# Altium PCB Wenzel_REF.PCBDOC (part 2 of 7)
Units mm, origin at the board's own origin, x right, y up, seen from the top; angles counter-clockwise.
Board outline 222.63 x 100.1 mm, 4 copper layers (Top, L2, L3, Bot), stack 1.6 mm thick; 406 components, 236 nets, 1324 pads, 1362 vias.
Unrouted connection lines stored in the file: 1.
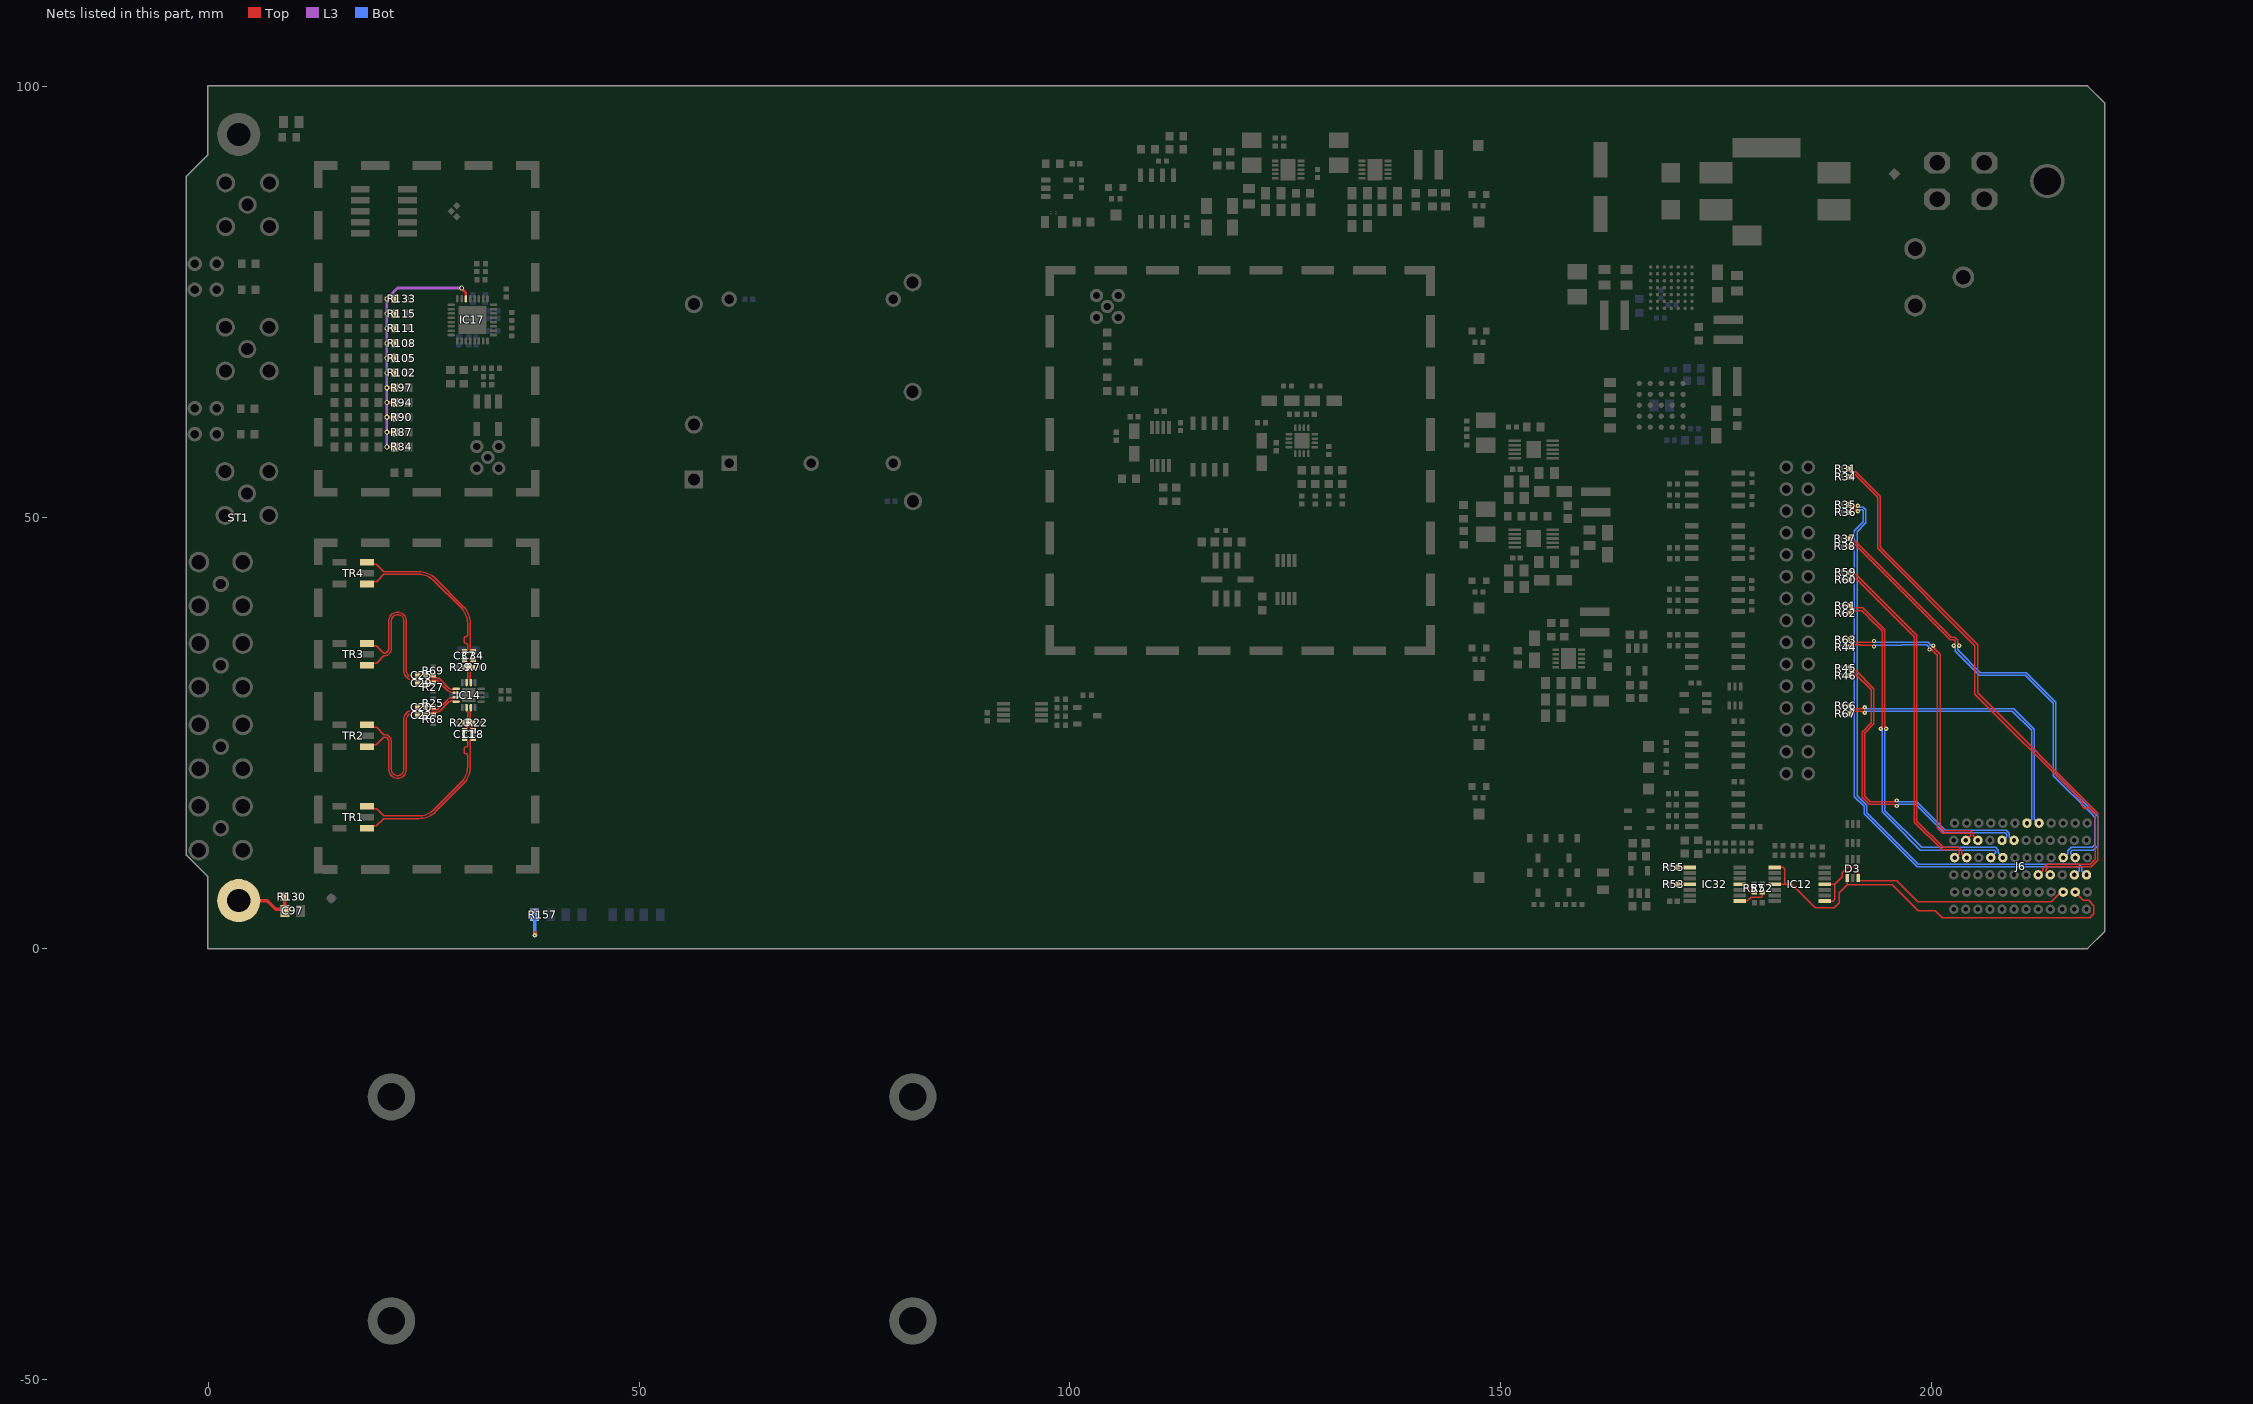
[diagram p4: the nets of this part, all layers, seen from the top]

## Footprints (in the part's own frame and the unit in brackets; to place one, negate y for a bottom-side part, rotate by r counter-clockwise, add the part's x,y. Pads: shape width x height; smd on the part's side, far side on the other; paste and mask are expansions set on the pad) (continued)
MSBOX_LAIRD_BMI-S-207-F [mm] "Frame of Standard Surface Mount Shield (Two Piece), External Dimensions 44.37 x 44.37mm"
  rect 1x3.485 smd: 1(-22.085,20.843) 8(-22.085,-20.843) 15(22.085,-20.843) 22(22.085,20.843)
  rect 2.485x1 smd: 1(-20.342,22.085) 8(-20.342,-22.085) 15(20.342,-22.085) 22(20.342,22.085)
  rect 1x3.8 smd: 2(-22.085,15) 3(-22.085,9) 4(-22.085,3) 5(-22.085,-3) 6(-22.085,-9) 7(-22.085,-15) 16(22.085,-15) 17(22.085,-9) 18(22.085,-3) 19(22.085,3) 20(22.085,9) 21(22.085,15)
  rect 3.8x1 smd: 9(-15,-22.085) 10(-9,-22.085) 11(-3,-22.085) 12(3,-22.085) 13(9,-22.085) 14(15,-22.085) 23(15,22.085) 24(9,22.085) 25(3,22.085) 26(-3,22.085) 27(-9,22.085) 28(-15,22.085)
  silkscreen extent -22.94,-22.94 22.94,22.94, body extent -22.23,-22.23 22.24,22.24, height 9.75
"Net Tie" [mil] "SMD Net Tie"
  rect 5x5 smd paste-2.5 mask-2.5: 1(0,0) 2(10,0)
  Top lines w5: 10,0 0,0
OSC_PLETRONICS_OLA5 [mm] "Oscillator, 5 Leads, Body 27.2mm X 36.1mm, KVG Case Style BF9-IS-S-15"
  rect 1.8x1.8 hole 1.1: 1(-9.525,9.525)
  round 1.8 hole 1.1: 2(-9.525,0) 3(-9.525,-9.525) 4(9.525,-9.525) 5(9.525,9.525)
  silkscreen extent -12.89,-12.89 12.89,12.89, body extent -12.89,-12.89 12.89,12.89, height 13.36
OSC_WENZEL_501-27514-X4 [mm] "Oscillator, 5 Pin, 50.8mm L X 50.8mm W X 19.05mm H, 501 Series"
  rect 2.1x2.1 hole 1.4: 1(-12.7,-10.16)
  round 2.1 hole 1.4: 2(12.725,-12.7) 3(12.7,0) 4(12.7,12.7) 5(-12.7,10.16) 6(-12.7,-3.81)
  silkscreen extent -25.4,-25.4 25.4,27.4, body extent -25.4,-25.4 25.4,27.4, height 19.05
PCBM_U-BLOX_RCB-F9T-1_A [mm] "UBLOX Board  Reference RCB-F9T-1 Body 67.17mm x 31.75mm"
  round 5.5 hole 3.2: MEC1(-30.735,13) MEC3(29.765,-13) MEC4(29.765,13)
  round 5.5 hole 3.2 unplated: MEC2(-30.735,-13)
  silkscreen extent -38.8,-15.88 33.59,15.88, body extent -38.8,-15.88 33.59,15.88, height 9.63
QFN50P300X300X80-17N-S160 [mm] "QFN, 0.50mm Pitch, Square; 4 Pin X 4 Pin, 3mm X 3mm X 0.80mm H Body (w/Thermal tab 1.60 X 1.60mm),  IPC Medium Density"
  oval 0.85x0.3 smd: 1(-1.45,0.75) 2(-1.45,0.25) 3(-1.45,-0.25) 4(-1.45,-0.75) 9(1.45,-0.75) 10(1.45,-0.25) 11(1.45,0.25) 12(1.45,0.75)
  oval 0.3x0.85 smd: 5(-0.75,-1.45) 6(-0.25,-1.45) 7(0.25,-1.45) 8(0.75,-1.45) 13(0.75,1.45) 14(0.25,1.45) 15(-0.25,1.45) 16(-0.75,1.45)
  rect 1.6x1.6 smd: 17(0,0)
  silkscreen extent -2.58,-1.5 1.5,1.5, body extent -1.57,-1.57 1.58,1.58, height 0.8
QFN50P300X300X80-17N-S175 [mm] "QFN, 0.50mm Pitch, Square; 16 Pin, 3.00mm L X 3.00mm W X 0.80mm H Body (w/Thermal Tab 1.75 X 1.75mm),  IPC Medium Density"
  oval 0.8x0.3 smd: 1(-1.5,0.75) 2(-1.5,0.25) 3(-1.5,-0.25) 4(-1.5,-0.75) 9(1.5,-0.75) 10(1.5,-0.25) 11(1.5,0.25) 12(1.5,0.75)
  oval 0.3x0.8 smd: 5(-0.75,-1.5) 6(-0.25,-1.5) 7(0.25,-1.5) 8(0.75,-1.5) 13(0.75,1.5) 14(0.25,1.5) 15(-0.25,1.5) 16(-0.75,1.5)
  rect 1.75x1.75 smd: 17(0,0)
  silkscreen extent -2.62,-1.5 1.5,1.5, body extent -1.57,-1.57 1.58,1.58, height 0.8
QFN50P500X500X100-33N-S325 [mm] "QFN, (MO-220-VHHD-2) 0.50mm pitch,square; 8 pin X 8 pin, 5mm X 5mm X 1.00mm H body (w/thermal tab 3.25 X 3.25mm),  IPC Medium Density"
  oval 0.85x0.3 smd: 1(-2.45,1.75) 2(-2.45,1.25) 3(-2.45,0.75) 4(-2.45,0.25) 5(-2.45,-0.25) 6(-2.45,-0.75) 7(-2.45,-1.25) 8(-2.45,-1.75) 17(2.45,-1.75) 18(2.45,-1.25) 19(2.45,-0.75) 20(2.45,-0.25) 21(2.45,0.25) 22(2.45,0.75) 23(2.45,1.25) 24(2.45,1.75)
  oval 0.3x0.85 smd: 9(-1.75,-2.45) 10(-1.25,-2.45) 11(-0.75,-2.45) 12(-0.25,-2.45) 13(0.25,-2.45) 14(0.75,-2.45) 15(1.25,-2.45) 16(1.75,-2.45) 25(1.75,2.45) 26(1.25,2.45) 27(0.75,2.45) 28(0.25,2.45) 29(-0.25,2.45) 30(-0.75,2.45) 31(-1.25,2.45) 32(-1.75,2.45)
  rect 3.25x3.25 smd: 33(0,0)
  silkscreen extent -3.57,-2.5 2.5,2.5, body extent -2.5,-2.5 2.5,2.5, height 1
RESC1005X40N [mm] "Chip Resistor, EIA 0402, Metric 1005, Body 1.0x0.5mm, IPC Medium Density"
  rect 0.58x0.62 smd: 1(-0.47,0) 2(0.47,0)
  body extent -0.52,-0.27 0.53,0.28, height 0.4
RESC1608X55N [mm] "Chip Resistor, EIA 0603, Metric 1608, Body 1.6x0.8mm, IPC Medium Density"
  rect 0.9x1 smd: 1(-0.8,0) 2(0.8,0)
  body extent -0.87,-0.47 0.88,0.48, height 0.55
RESC2012X60N [mm] "Chip Resistor, EIA 0805, Metric 2012, Body 2.0x1.2mm, IPC Medium Density"
  rect 0.95x1.4 smd: 1(-1,0) 2(1,0)
  silkscreen extent 0,-0.55 0,0.55, body extent -1.1,-0.67 1.1,0.68, height 0.6
RESC2113X55N [mm] "Chip Resistor, EIA 0805, Metric 2113, Body 2.05x1.3mm, IPC Medium Density"
  rect 1x1.45 smd: 1(-0.95,0) 2(0.95,0)
  silkscreen extent 0,-0.55 0,0.55, body extent -1,-0.62 1,0.63, height 0.55
RESC3216X80N [mm] "Chip Resistor, EIA 1206, Metric 3216, Body 3.2x1.6mm, IPC Medium Density"
  rect 1.25x1.85 smd: 1(-1.5,0) 2(1.5,0)
  silkscreen extent -0.5,-0.8 0.5,0.8, body extent -1.67,-0.87 1.68,0.88, height 0.8
SAMTEC_MMCX-J-P-H-ST-TH1 [mm] "Straight Through-hole 50 Ohm Micro Mini RF Jack, MMCX Serie"
  round 1.55 hole 0.85: 1(0,0) 2(-1.27,-1.27) 2(-1.27,1.27) 2(1.27,-1.27) 2(1.27,1.27)
  silkscreen extent -1.75,-1.75 1.75,1.75, body extent -1.75,-1.75 1.75,1.75, height 4.35
SCHROFF_PANEL_3HP_4U [mm] "Schroff PCB 3HP 4U Eurocard Panel Kit"
  round 5 / inner round 3.7 / far side round 5 hole 2.7: 0(0,0) 1(0,88.9)
  silkscreen extent -6.1,-8.6 2.75,97.5
SOD2512X110N [mm] "Small Outline Diode (SOD-323), 1.70mm W X 1.25mm L X 1.10mm H body,  IPC Medium Density"
  rect 0.9x0.5 smd: 1(-1.3,0) 2(1.3,0)
  silkscreen extent -1.63,-0.65 0.85,0.87, body extent -1.35,-0.67 1.35,0.68, height 1.1
SOD3716X135N [mm] "SOD Diode (SOD-123), 2.70mm W X 1.60mm L X 1.35mm H body, IPC Medium Density"
  rect 1x0.8 smd: 1(-1.8,0) 2(1.8,0)
  silkscreen extent -2.17,-0.8 1.35,1.02, body extent -1.95,-0.85 1.95,0.85, height 1.35
SOIC127P600X175-8N [mm] "SOIC 8, Pitch 1.27mm - Body 4x5mm, IPC Medium Density"
  rect 1.55x0.6 smd: 1(-2.7,1.905) 2(-2.7,0.635) 3(-2.7,-0.635) 4(-2.7,-1.905) 5(2.7,-1.905) 6(2.7,-0.635) 7(2.7,0.635) 8(2.7,1.905)
  silkscreen extent -2.53,-2.5 1.55,2.88, body extent -3.1,-2.5 3.1,2.5, height 1.75
SON50P300X300X80-11N-R175X248 [mm] "SON, 0.50mm Pitch; 10-pin, 3.00mm W  X 3.00mm L X 0.80mm H Body, (w/thermal tab 1.75 X 2.48 mm), IPC Medium Density"
  rect 0.8x0.3 smd: 1(-1.5,1) 2(-1.5,0.5) 3(-1.5,0) 4(-1.5,-0.5) 5(-1.5,-1) 6(1.5,-1) 7(1.5,-0.5) 8(1.5,0) 9(1.5,0.5) 10(1.5,1)
  rect 1.75x2.48 smd: 11(0,0)
  silkscreen extent -2.53,0.88 -2.28,1.12, body extent -1.5,-1.5 1.5,1.5, height 0.8
SOP50P490X110-11N-R168X198 [mm] "SOP, 0.50mm, Pitch; 10 pin, 3.00mm W X 3.00mm L X 1.10mm H body (w/thermal tab  1.68 X 1.98 mm), IPC Medium Density"
  rect 1.45x0.3 smd: 1(-2.2,1) 2(-2.2,0.5) 3(-2.2,0) 4(-2.2,-0.5) 5(-2.2,-1) 6(2.2,-1) 7(2.2,-0.5) 8(2.2,0) 9(2.2,0.5) 10(2.2,1)
  rect 1.68x1.98 smd: 11(0,0)
  silkscreen extent -2.78,-1.5 1.1,1.77, body extent -2.45,-1.55 2.45,1.55, height 1.1
SOP65P490X109-8N [mm] "SOP, 0.65mm pitch; 8 pin,3.00mm W X 3.00mm L X 1.09mm H bodyI, PC Medium Density"
  rect 1.5x0.45 smd: 1(-2.2,0.975) 2(-2.2,0.325) 3(-2.2,-0.325) 4(-2.2,-0.975) 5(2.2,-0.975) 6(2.2,-0.325) 7(2.2,0.325) 8(2.2,0.975)
  silkscreen extent -2.83,-1.5 1.12,1.82, body extent -2.45,-1.55 2.45,1.55, height 1.09
SOP65P490X110-8N [mm] "SOP, 0.65mm pitch; 8 pin, 3.00mm W X 3.00mm L X 1.10mm H body, IPC Medium Density"
  rect 1.5x0.45 smd: 1(-2.2,0.975) 2(-2.2,0.325) 3(-2.2,-0.325) 4(-2.2,-0.975) 5(2.2,-0.975) 6(2.2,-0.325) 7(2.2,0.325) 8(2.2,0.975)
  silkscreen extent -2.82,-1.5 1.12,1.82, body extent -2.45,-1.55 2.45,1.55, height 1.1
SOP65P640X110-14N [mm] "SOP, 14-Leads, Body 4.4x5mm (max), Pitch 0.65mm, IPC Medium Density"
  rect 1.45x0.45 smd: 1(-2.9,1.95) 2(-2.9,1.3) 3(-2.9,0.65) 4(-2.9,0) 5(-2.9,-0.65) 6(-2.9,-1.3) 7(-2.9,-1.95) 8(2.9,-1.95) 9(2.9,-1.3) 10(2.9,-0.65) 11(2.9,0) 12(2.9,0.65) 13(2.9,1.3) 14(2.9,1.95)
  silkscreen extent -3.48,-2.5 1.85,2.82, body extent -3.12,-2.55 3.12,2.55, height 1.1
SOT65P210X110-6N [mm] "SOT363, SC70-6, SOT, 0.65mm Pitch, 6 Pin, 1.25mm W X 2.00mm L X 1.10mm H, IPC Medium Density"
  rect 0.95x0.4 smd: 1(-1.1,0.65) 2(-1.1,0) 3(-1.1,-0.65) 4(1.1,-0.65) 5(1.1,0) 6(1.1,0.65)
  silkscreen extent -1.42,-1 0.3,1.48, body extent -1.2,-1.1 1.2,1.1, height 1.1
SOT95P230X110-3N [mm] "SOT23, 3 pin, Pitch 0.95mm - 1.3mm W X 2.9mm L X 1.1mm H, IPC Medium Density"
  rect 1x0.6 smd: 1(-1.15,0.95) 2(-1.15,-0.95) 3(1.15,0)
  silkscreen extent -1.52,-1.45 0.33,1.88, body extent -1.08,-1.5 1.25,1.5, height 1.1
SOT95P280X145-5N [mm] "SOT, 0.95mm pitch; 5 pin, 1.60mm W X 2.90mm L X 1.45mm H body, IPC Medium Density"
  rect 1.1x0.6 smd: 1(-1.3,0.95) 2(-1.3,0) 3(-1.3,-0.95) 4(1.3,-0.95) 5(1.3,0.95)
  silkscreen extent -1.72,-1.45 0.43,1.87, body extent -1.4,-1.5 1.4,1.5, height 1.45
SWITCHCRAFT_L712RA [mm] "CONN PWR JACK 2.5X5.5MM SOLDER"
  round 2.5 hole 1.7: 1(-5.6,-3.3) 2(0,-6.6) 3(0,0)
  silkscreen extent -22,-8.84 -1.32,2.21, body extent -22,-8.84 1.35,2.18, height 13.9
TPS127 [mm] "1.27 x  1.27mm SMD Test Point Area"
  rect 1.27x1.27 smd paste-1.27: 1(0,0)
  silkscreen extent -0.94,-0.94 0.94,0.94
XFMR_MINI-CIRCUITS_AT1521 [mm] "MINI-CIRCUITS RF Transformer, Case AT1521, Body 3.81X3.81mm"
  rect 0.76x1.65 smd: 1(-1.27,1.59) 2(0,1.59) 3(1.27,1.59) 4(1.27,-1.59) 6(-1.27,-1.59)
  silkscreen extent -2.3,-0.37 1.91,1.72, body extent -1.9,-1.9 1.91,1.91, height 4.06

## Part data
C1 C2 C4 C5 C6 C14 C16 C17 C19 C21 C23 C27 C28 C30 C65 C72 C73 C83 C92 C96 C105 C108 C117 C121 C122 C125: library part CC0805_22UF_16V_10%_X5R, "Non-polarised capacitor", Case=0805, Manufacturer=GENERIC, Manufacturer1 ComponentHeight=1.35mm, Manufacturer1 Example=TDK, Manufacturer1 Part Number=C2012X5R1C226KT, Tolerance=±10%, Voltage=16V, Author="CERN DEM JLC", Component Type=Standard, CreateDate=25.10.2012, HelpURL=\\cern.ch\dfs\Applications\Altium\Datasheets\CC0805_X5R_TDK_C.pdf, LatestRevisionDate=25.10.2012, Manufacturer Part Number=CC0805_22UF_16V_10%_X5R, Mounted=Yes, Part Description="SMD Multilayer Chip Ceramic Capacitor", Part Number=CC0805_22UF_16V_10%_X5R, Pin Count=2, Sense=No, SMD=Yes, Socket=No, Status=Preferred, TC=X5R
C3: library part CC0603_2.2UF_16V_10%_X5R, "Non-polarised capacitor", Case=0603, Manufacturer=GENERIC, Manufacturer1 ComponentHeight=0.9mm, Manufacturer1 Example="YAGEO PHYCOMP", Manufacturer1 Part Number=CC0603KRX5R7BB225, Tolerance=±10%, Voltage=16V, Author="CERN DEM JLC", Component Type=Standard, CreateDate=28.04.2011, HelpURL=\\cern.ch\dfs\Applications\Altium\Datasheets\CC0805_X5R_PHYCOMP_HC.pdf, LatestRevisionDate=28.04.2011, Manufacturer Part Number=CC0603_2.2UF_16V_10%_X5R, Mounted=Yes, Part Description="SMD Multilayer Chip Ceramic Capacitor", Part Number=CC0603_2.2UF_16V_10%_X5R, Pin Count=2, Sense=No, SMD=Yes, Socket=No, Status=Preferred, TC=X5R
C7 C8 C10 C74 C94 C100 C103 C149: library part CC0603_1UF_25V_10%_X7R, "Non-polarised capacitor", Case=0603, Manufacturer=GENERIC, Manufacturer1 ComponentHeight=0.9mm, Manufacturer1 Example=MURATA, Manufacturer1 Part Number=GRM188R71E105KA12D, Tolerance=±10%, Voltage=25V, Author="CERN DEM JLC", Component Type=Standard, CreateDate=18.01.2011, HelpURL=\\cern.ch\dfs\Applications\Altium\Datasheets\CC0603_X7R_MURATA.pdf, LatestRevisionDate=18.01.2011, Manufacturer Part Number=CC0603_1UF_25V_10%_X7R, Mounted=Yes, Part Description="SMD Multilayer Chip Ceramic Capacitor", Part Number=CC0603_1UF_25V_10%_X7R, Pin Count=2, Sense=No, SMD=Yes, Socket=No, Status=None, TC=X7R
C9 C11 C15 C18 C20 C22 C25 C29 C31 C33 C34 C36 C37 C38 C39 C40 C41 C42 C46 C48 C50 C51 C56 C61 C62 C78 C80 C82 C84 C86 C87 C88 C89 C90: library part CC0402_100NF_16V_10%_X5R, "Non-polarised capacitor", Case=0402, Manufacturer=GENERIC, Manufacturer1 ComponentHeight=0.55mm, Manufacturer1 Example=MURATA, Manufacturer1 Part Number=GRM155R61C104KA88D, Tolerance=±10%, Voltage=16V, Author="CERN DEM JLC", Component Type=Standard, CreateDate=10.12.2013, HelpURL=\\cern.ch\dfs\Applications\Altium\Datasheets\CC0402_X5R_MURATA_GRM.pdf, LatestRevisionDate=10.12.2013, Manufacturer Part Number=CC0402_100NF_16V_10%_X5R, Mounted=Yes, Part Description="SMD Multilayer Chip Ceramic Capacitor", Part Number=CC0402_100NF_16V_10%_X5R, Pin Count=2, Sense=No, SMD=Yes, Socket=No, Status=None, TC=X5R
C12 C26 C60 C69 C75 C77 C85 C99 C138: library part CTE3216-18_10UF_16V_20%_AVX_TCJ, "Polarised capacitor", Case=A, Manufacturer=AVX, Manufacturer Part Number="TCJA106M016R0200 or  or TR3A106K016C1700", Tolerance=±20%, Voltage=16V, Author="CERN DEM JLC", Component Type=Standard, ComponentHeight=1.8mm, CreateDate=29.03.2012, HelpURL=\\cern.ch\dfs\Applications\Altium\Datasheets\CTE_AVX_TCJ.pdf, LatestRevisionDate=29.03.2012, Mounted=Yes, Part Description="ESR 0R200 Tantalum Solid Electrolytic Chip Capacitor with Conductive Polymer Electrode", Part Number=CTE3216-18_10UF_16V_20%_AVX_TCJ, Pin Count=2, Sense=No, SMD=Yes, Socket=No, Status=Preferred
C13 C79 C104: library part CC0603_22UF_6.3V_20%_X5R, "Non-polarised capacitor", Case=0603, Manufacturer=GENERIC, Manufacturer1 ComponentHeight=0.9mm, Manufacturer1 Example=TDK, Manufacturer1 Part Number=C1608X5R0J226M080, Tolerance=±20%, Voltage=6.3V, Author="CERN DEM JLC", Component Type=Standard, HelpURL=\\cern.ch\dfs\Applications\Altium\Datasheets\CC0603_X5R_TDK_C.pdf, Manufacturer Part Number=CC0603_22UF_6.3V_20%_X5R, Mounted=Yes, Part Description="SMD Multilayer Chip Ceramic Capacitor", Part Number=CC0603_22UF_6.3V_20%_X5R, Pin Count=2, Sense=No, SMD=Yes, Socket=No, Status=None, TC=X5R
  C13 C104: CreateDate=16.12.2013, LatestRevisionDate=03.12.2020
  C79: CreateDate=2013-12-16, LatestRevisionDate=2020-12-03
C24 C70 C71 C76 C142 C143 C154: library part CC0402_100NF_16V_10%_X7R, "Non-polarised capacitor", Case=0402, Manufacturer=GENERIC, Manufacturer1 ComponentHeight=0.55mm, Manufacturer1 Example=MURATA, Manufacturer1 Part Number=GRM155R71C104KA88D, Tolerance=±10%, Voltage=16V, Author="CERN DEM JLC", Component Type=Standard, CreateDate=2013-12-05, HelpURL=\\cern.ch\dfs\Applications\Altium\Datasheets\CC0402_X7R_MURATA_GRM.pdf, LatestRevisionDate=2007-12-03, Manufacturer Part Number=CC0402_100NF_16V_10%_X7R, Mounted=Yes, Part Description="SMD Multilayer Chip Ceramic Capacitor", Part Number=CC0402_100NF_16V_10%_X7R, Pin Count=2, Sense=No, SMD=Yes, Socket=No, Status="Not Recommended", TC=X7R
C32 C91: library part CTE3528-21_22UF_10V_10%_LESR0700, "Polarised capacitor", Case=B, Manufacturer=GENERIC, Manufacturer1 ComponentHeight=2.1mm, Manufacturer1 Example=AVX, Manufacturer1 Part Number=TPSB226K010R0700, Tolerance=±10%, Voltage=10V, Author="CERN DEM JLC", Component Type=Standard, CreateDate=05.05.2008, HelpURL=\\cern.ch\dfs\Applications\Altium\Datasheets\CTE-LESR_AVX_TPS.pdf, LatestRevisionDate=20.01.2009, Manufacturer Part Number=CTE3528-21_22UF_10V_10%_LESR0700, Mounted=Yes, Part Description="Low ESR 0R7 Solid Tantalum Chip Capacitor", Part Number=CTE3528-21_22UF_10V_10%_LESR0700, Pin Count=2, Sense=No, SMD=Yes, Socket=No, Status=Preferred
C35 C64 C66 C68: library part CC0603_15PF_50V_5%_NP0, "Non-polarised capacitor", Case=0603, Manufacturer=GENERIC, Manufacturer1 ComponentHeight=0.87mm, Manufacturer1 Example=PHYCOMP, Manufacturer1 Part Number=223886715159, Tolerance=±5%, Voltage=50V, Author="CERN DEM JLC", Component Type=Standard, CreateDate=03/12/2007, HelpURL=\\cern.ch\dfs\Applications\Altium\Datasheets\CC0603_NP0_PHYCOMP.pdf, LatestRevisionDate=03/12/2007, Manufacturer Part Number=CC0603_15PF_50V_5%_NP0, Mounted=Yes, Part Description="SMD Multilayer Chip Ceramic Capacitor", Part Number=CC0603_15PF_50V_5%_NP0, Pin Count=2, Sense=No, SMD=Yes, Socket=No, Status=Preferred, TC=C0G/NP0
C43 C44 C45 C47 C49 C54 C55 C57 C58 C59: library part CC0402_10NF_16V_10%_X7R, "Non-polarised capacitor", Case=0402, Manufacturer=GENERIC, Manufacturer1 ComponentHeight=0.55mm, Manufacturer1 Example=PHYCOMP, Manufacturer1 Part Number=223878715636, Tolerance=±10%, Voltage=16V, Author="CERN DEM JLC", Component Type=Standard, CreateDate=03.12.2007, HelpURL=\\cern.ch\dfs\Applications\Altium\Datasheets\CC0402_X7R_PHYCOMP.pdf, LatestRevisionDate=03.12.2007, Manufacturer Part Number=CC0402_10NF_16V_10%_X7R, Mounted=Yes, Part Description="SMD Multilayer Chip Ceramic Capacitor", Part Number=CC0402_10NF_16V_10%_X7R, Pin Count=2, Sense=No, SMD=Yes, Socket=No, Status="Not Recommended", TC=X7R
C52 C53: library part CC0402_100NF_25V_10%_X7R_YUDEN_TMK105B7104KVHF, "Non-polarised capacitor", Case=0402, Manufacturer="TAIYO YUDEN", Manufacturer Part Number=TMK105B7104KVHF, Tolerance=±10%, Voltage=25V, Author="CERN DEM JLC", Component Type=Standard, ComponentHeight=0.55mm, CreateDate=10/05/2017, HelpURL=\\cern.ch\dfs\Applications\Altium\Datasheets\CC0402_TAIYO-YUDEN_TMK105B7104KVHF.pdf, LatestRevisionDate=10/05/2017, Mounted=Yes, Part Description="SMD Multilayer Chip Ceramic Capacitor (High Dielectric Type) for Automotive / Industrial Applications", Part Number=CC0402_100NF_25V_10%_X7R_YUDEN_TMK105B7104KVHF, Pin Count=2, Sense=No, SMD=Yes, Socket=No, Status="Not Recommended", TC=X7R
C63: library part CC0402_10PF_50V_5%_C0G, "Non-polarised capacitor", Case=0402, Manufacturer=GENERIC, Manufacturer1 ComponentHeight=0.55mm, Manufacturer1 Example=KEMET, Manufacturer1 Part Number=C0402C100J5GACTU, Tolerance=±5%, Voltage=50V, Author="CERN DEM JLC", Component Type=Standard, CreateDate=03.12.2007, HelpURL="\\cern.ch\dfs\Applications\Altium\Datasheets\CC0805_C0G_KEMET_(Commercial Grade).pdf", LatestRevisionDate=22.04.2015, Manufacturer Part Number=CC0402_10PF_50V_5%_C0G, Mounted=Yes, Part Description="SMD Multilayer Chip Ceramic Capacitor", Part Number=CC0402_10PF_50V_5%_C0G, Pin Count=2, Sense=No, SMD=Yes, Socket=No, Status=Preferred, TC=C0G/NP0
C67: library part CC0402_47PF_50V_1%_C0G_MURATA_GJM1555C1H470FB01D, "Non-polarised capacitor", Case=0402, Manufacturer=MURATA, Manufacturer Part Number=GJM1555C1H470FB01D, Tolerance=±1%, Voltage=50V, Author="CERN DEM BC", Component Type=Standard, ComponentHeight=0.55mm, CreateDate=20.11.2017, HelpURL=\\cern.ch\dfs\Applications\Altium\Datasheets\CC0402_MURATA_GJM1555C1H470FB01D.pdf, LatestRevisionDate=20.11.2017, Mounted=Yes, Part Description="High-Q SMD Chip Monolithic Ceramic Capacitor", Part Number=CC0402_47PF_50V_1%_C0G_MURATA_GJM1555C1H470FB01D, Pin Count=2, Sense=No, SMD=Yes, Socket=No, Status=None, TC=C0G/NP0
C81: library part CC0402_1UF_16V_10%_X5R, "Non-polarised capacitor", Case=0402, Manufacturer=GENERIC, Manufacturer1 ComponentHeight=0.55mm, Manufacturer1 Example=TDK, Manufacturer1 Part Number=C1005X5R1C105KT, Tolerance=±10%, Voltage=16V, Author="CERN DEM JLC", Component Type=Standard, CreateDate=2012-10-25, HelpURL=\\cern.ch\dfs\Applications\Altium\Datasheets\CC0402_X5R_TDK_C.pdf, LatestRevisionDate=2012-10-25, Manufacturer Part Number=CC0402_1UF_16V_10%_X5R, Mounted=Yes, Part Description="SMD Multilayer Chip Ceramic Capacitor", Part Number=CC0402_1UF_16V_10%_X5R, Pin Count=2, Sense=No, SMD=Yes, Socket=No, Status=Preferred, TC=X5R
C93 C123 C124: library part CTE3528-21_22UF_20V_10%_LESR0400, "Polarised capacitor", Case=B, Manufacturer=GENERIC, Manufacturer1 ComponentHeight=2.1mm, Manufacturer1 Example=AVX, Manufacturer1 Part Number=TPSB226K020R0400, Tolerance=±10%, Voltage=20V, Author="CERN DEM JLC", Component Type=Standard, CreateDate=25.04.2013, HelpURL=\\cern.ch\dfs\Applications\Altium\Datasheets\CTE-LESR_AVX_TPS.pdf, LatestRevisionDate=25.04.2013, Manufacturer Part Number=CTE3528-21_22UF_20V_10%_LESR0400, Mounted=Yes, Part Description="Low ESR 0R4 Solid Tantalum Chip Capacitor", Part Number=CTE3528-21_22UF_20V_10%_LESR0400, Pin Count=2, Sense=No, SMD=Yes, Socket=No, Status=Preferred
C95 C97: library part CC0805_NO-VALUE, "Non-polarised capacitor", Case=0805, Manufacturer1 ComponentHeight=1.35mm, Author="CERN DEM JLC", Component Type=Standard, CreateDate=10.12.2008, HelpURL=Undefined, LatestRevisionDate=11.09.2013, Manufacturer=Undefined, Manufacturer Part Number=CC0805_NO-VALUE, Mounted=No, Part Description="Reserved Footprint For 0805(2012) Chip Ceramic Capacitor", Part Number=CC0805_NO-VALUE, Pin Count=2, Sense=No, SMD=Yes, Socket=No, Status=None
C98: library part CAE830-620_220UF_16V_20%, "Polarised capacitor", Case=E, Manufacturer=PANASONIC, Manufacturer Part Number=EEEFK1C221AP, Tolerance=±20%, Voltage=16V, Author="CERN DEM JLC", Component Type=Standard, ComponentHeight=6.2mm, CreateDate=03.12.2007, HelpURL=\\cern.ch\dfs\Applications\Altium\Datasheets\CAE_PANASONIC_FK.pdf, LatestRevisionDate=05.11.2014, Mounted=Yes, Part Description="Aluminum Electrolytic SMT Capacitor", Part Number=CAE830-620_220UF_16V_20%, Pin Count=2, Sense=No, SMD=Yes, Socket=No, Status="Not Recommended"
C101 C102: library part CTE3216-18_22UF_6.3V_10%_LESR0900, "Polarised capacitor", Case=A, Manufacturer=GENERIC, Manufacturer1 ComponentHeight=1.8mm, Manufacturer1 Example=AVX, Manufacturer1 Part Number=TPSA226K006R0900, Tolerance=±10%, Voltage=6.3V, Author="CERN DEM JLC", Component Type=Standard, CreateDate=05.05.2008, HelpURL=\\cern.ch\dfs\Applications\Altium\Datasheets\CTE-LESR_AVX_TPS.pdf, LatestRevisionDate=20.01.2009, Manufacturer Part Number=CTE3216-18_22UF_6.3V_10%_LESR0900, Mounted=Yes, Part Description="Low ESR 0R9 Solid Tantalum Chip Capacitor", Part Number=CTE3216-18_22UF_6.3V_10%_LESR0900, Pin Count=2, Sense=No, SMD=Yes, Socket=No, Status=Preferred
C167: library part CC0603_10UF_10V_10%_X5R, "Non-polarised capacitor", Case=0603, Manufacturer=GENERIC, Manufacturer1 ComponentHeight=0.8mm, Manufacturer1 Example=MURATA, Manufacturer1 Part Number=GRM188R61A106KE69D, Tolerance=±10%, Voltage=10V, Author="CERN DEM JLC", Component Type=Standard, CreateDate=31.01.2017, HelpURL=\\cern.ch\dfs\Applications\Altium\Datasheets\CC0603_MURATA_GRM188R61A106KE69D.pdf, LatestRevisionDate=31.01.2017, Manufacturer Part Number=CC0603_10UF_10V_10%_X5R, Mounted=Yes, Part Description="SMD Multilayer Chip Ceramic Capacitor", Part Number=CC0603_10UF_10V_10%_X5R, Pin Count=2, Sense=No, SMD=Yes, Socket=No, Status=None, TC=X5R
CON1: library part CON_CRIMP_4.2mm_RA_4, "4.2mm cripm terminal header"
D1: "Schottky Diode", Case=SOD323, Manufacturer=INFINEON, Power=750mA, Voltage=40V, Author="CERN DEM JLC", Bonding=No, Component Type=Standard, ComponentHeight=1.1mm, CreateDate=12.11.2014, Device=BAT165, HelpURL=\\cern.ch\dfs\Applications\Altium\Datasheets\BAT165.pdf, LatestRevisionDate=12.11.2014, Manufacturer Part Number=BAT165, Mounted=Yes, PackageDescription="Small Outline Diode (SOD-323), 1.70mm W X 1.25mm L X 1.10mm H body,  IPC Medium Density", Part Description="Medium Power AF Schottky Diode", Part Number=BAT165, Pin Count=2, PressFit=No, Sense=No, SMD=Yes, Socket=No
D2: library part D_TVS_DRTR5V0U4S-7, "Integrated Quad Ultra-Low Capacitance ESD Protection", Case=SOT363, Manufacturer=DIODES, Author=GK, Bonding=No, Component Type=Standard, ComponentHeight=1.1mm, CreateDate=24.01.2017, Device=DRTR5V0U4S-7, HelpURL=\\cern.ch\dfs\Applications\Altium\Datasheets\PRTR5V0U4Y.pdf, LatestRevisionDate=14.09.2020, Manufacturer Part Number=DRTR5V0U4S-7, Mounted=Yes, PackageDescription="SOT363, SC70-6, 0.65mm Pitch; 6 Pin, 1.25mm W X 2.00mm L X 1.10mm H body, IPC Medium Density", Part Description="Integrated Quad Ultra-Low Capacitance ESD (±8kV) Protection", Part Number=DRTR5V0U4S-7, Pin Count=6, PressFit=No, Sense=No, SMD=Yes, Socket=No, Status=Active, Status Comment=Active
D3 D6: "Fivefold ESD Protection Diode Arrays", Case=SOT363, Manufacturer=NEXPERIA, Power=200W, Voltage=3.3V, Author="CERN DEM WB", Bonding=No, Component Type=Standard, ComponentHeight=1.1mm, CreateDate=05.07.2021, Device=PESD3V3L5UY, HelpURL=\\cern.ch\dfs\Applications\Altium\Datasheets\PESD3V3L5UY.pdf, LatestRevisionDate=05.07.2021, Manufacturer Part Number=PESD3V3L5UY, Mounted=Yes, PackageDescription="SOT363, SC-88, 0.65mm Pitch; 6 Pin, 1.25mm W X 2.00mm L X 1.10mm H body, IPC Medium Density", Part Description="Fivefold ESD Protection Diode Arrays (30kV)", Part Number=PESD3V3L5UY, Pin Count=6, PressFit=No, Sense=No, SMD=Yes, Socket=No
D4: "Zener Diode", Case=SOD-123, Manufacturer="VISHAY SEMICONDUCTORS", Power=500mW, Voltage=10V, Author="CERN DEM HF", Bonding=No, Component Type=Standard, ComponentHeight=1.35mm, CreateDate=23.05.2022, Device=MMSZ5240C, HelpURL=\\cern.ch\dfs\Applications\Altium\Datasheets\MMSZ5248B-E3-08.pdf, LatestRevisionDate=23.05.2022, Manufacturer Part Number=MMSZ5240C, Mounted=Yes, PackageDescription="Diode (SOD-123), 2.70mm W X 1.60mm L X 1.35mm H body, IPC Medium Density", Part Description="Small Signal Zener Diode", Part Number=MMSZ5240C, Pin Count=2, PressFit=No, Sense=No, SMD=Yes, Socket=No
D7: "Schottky Diode", Case=SOD-323, Manufacturer=INFINEON, Power=750mA, Voltage=40V, Author="CERN DEM JLC", Bonding=No, Component Type=Standard, ComponentHeight=1.1mm, CreateDate=12.11.2014, Device=BAT165, HelpURL=\\cern.ch\dfs\Applications\Altium\Datasheets\BAT165.pdf, LatestRevisionDate=12.11.2014, Manufacturer Part Number=BAT165, Mounted=Yes, PackageDescription="Small Outline Diode (SOD-323), 1.70mm W X 1.25mm L X 1.10mm H body,  IPC Medium Density", Part Description="Medium Power AF Schottky Diode", Part Number=BAT165, Pin Count=2, PressFit=No, Sense=No, SMD=Yes, Socket=No
D11: "Zener Diode", Case=DO-214AA, Manufacturer="FAIRCHILD SEMICONDUCTOR", Power=600W, Voltage=15V, Author="CERN DEM JLC", Bonding=No, Component Type=Standard, ComponentHeight=2.65mm, CreateDate=08.12.2008, Device=SMBJ15A, HelpURL=\\cern.ch\dfs\Applications\Altium\Datasheets\SMBJ.pdf, LatestRevisionDate=19.12.2011, Manufacturer Part Number=SMBJ15A, Mounted=Yes, PackageDescription="DO-214-AA/SMB Diode, Molded Body; 5.34mm L X 3.625mm W X 2.65mm H, IPC Medium Density", Part Description="Uni-Directional Transient Voltage Suppressor Diode", Part Number=SMBJ15A, Pin Count=2, PressFit=No, Sense=No, SMD=Yes, Socket=No
FL1: library part FIL_MURATA_BNX022-01L, "Block Type EMIFIL (LC Combined)", Manufacturer=MURATA, Manufacturer Part Number=BNX022-01L, Resistance=0.5R, Author="CERN DEM JLC", Component Type=Standard, ComponentHeight=3.3mm, CreateDate=10.10.2012, HelpURL=\\cern.ch\dfs\Applications\Altium\Datasheets\FIL_MURATA_BNX022-01L.pdf, LatestRevisionDate=10.10.2012, Mounted=Yes, Part Description="Block Type EMIFIL (LC Combined) SMD Type, BNX02* Series", Part Number=FIL_MURATA_BNX022-01L, Pin Count=2, Sense=No, SMD=Yes, Socket=No, Status=None
FTG5: library part FIDUCIAL_TARGET_C100-200, "Fiducial Target", Author="CERN DEM JLC", ComponentHeight=0mm, Component Type="Standard (No BOM)", CreateDate=09.02.2010, Family=Fiducial, HelpURL=Undefined, LatestRevisionDate=04.04.2012, Mounted=No, PackageDescription="Round Fiducial Target, Top Layer, 1.0mm, Top Solder 2.0mm, Keepout =2.0mm", Part Description="Round Fiducial Target, Top Layer, 1.0mm, Top Solder 2.0mm, Keepout =2.0mm", Part Number=FIDUCIAL_TARGET_C100-200, Pin Count=1, Sense=No, SMD=Yes, Socket=No, Status=None
FTG6 FTG7 FTG8: library part FIDUCIAL_TARGET_S100-200, "Fiducial Target", Author="CERN DEM JLC", ComponentHeight=0mm, Component Type="Standard (No BOM)", CreateDate=09.02.2010, Family=Fiducial, HelpURL=Undefined, LatestRevisionDate=04.04.2012, Mounted=No, PackageDescription="Square Fiducial Target, Top Layer, 1.0mm, Top Solder 2.0mm, Keepout =2.0mm", Part Description="Square Fiducial Target, Top Layer, 1.0mm, Top Solder 2.0mm, Keepout =2.0mm", Part Number=FIDUCIAL_TARGET_S100-200, Pin Count=1, Sense=No, SMD=Yes, Socket=No, Status=None
IC1: "Current Shunt Monitor -16V to +80V Common-Mode Range", Case=SOT23-5, Manufacturer="TEXAS INSTRUMENTS", Author="CERN DEM JLC", Bonding=No, Component Type=Standard, ComponentHeight=1.45mm, CreateDate=10.05.2010, Device=INA194AIDBVT, HelpURL=\\cern.ch\dfs\Applications\Altium\Datasheets\INA194AIDBVT.pdf, LatestRevisionDate=10.05.2010, Manufacturer Part Number=INA194AIDBVT, Mounted=Yes, PackageDescription="SOT, 0.95mm pitch; 5 pin, 1.60mm W X 2.90mm L X 1.45mm H body, IPC Medium Density", Part Description="Current Shunt Monitor -16V to +80V Common-Mode Range", Part Number=INA194AIDBVT, Pin Count=5, PressFit=No, Sense=No, SMD=Yes, Socket=No
IC2 IC15: "500mA Peak Output LDO Regulator", Case=SOT23-5, Manufacturer="MICROCHIP TECHNOLOGY", Author="CERN DEM WB", Bonding=No, Component Type=Standard, ComponentHeight=1.45mm, CreateDate=2019-04-16, Device=MIC5219-3.3YM5, HelpURL=\\cern.ch\dfs\Applications\Altium\Datasheets\MIC5219-3.3YM5.pdf, LatestRevisionDate=2019-04-16, Manufacturer Part Number=MIC5219-3.3YM5, Mounted=Yes, PackageDescription="SOT, 0.95mm pitch; 5 pin, 1.60mm W X 2.90mm L X 1.45mm H body, IPC Medium Density", Part Description="3.3V 500mA Peak Output Low Drop-Out  (LDO) Regulator", Part Number=MIC5219-3.3YM5, Pin Count=5, PressFit=No, Sense=No, SMD=Yes, Socket=No
IC3 IC9 IC30: "20V, 500mA, Ultralow Noise, Ultrahigh PSRR Linear Regulator", Case=SON10, Manufacturer="LINEAR TECHNOLOGY", Author="CERN DEM JLC", Bonding=No, Component Type=Standard, ComponentHeight=0.8mm, CreateDate=07.12.2016, Device=LT3045EDD#PBF, HelpURL=\\cern.ch\dfs\Applications\Altium\Datasheets\LT3045EDD#PBF.pdf, LatestRevisionDate=07.12.2016, Manufacturer Part Number=LT3045EDD#PBF, Mounted=Yes, Part Description="20V, 500mA, Ultralow Noise, Ultrahigh PSRR Linear Regulator", Part Number=LT3045EDD#PBF, Pin Count=11, PressFit=No, Sense=No, SMD=Yes, Socket=No
  IC3: PackageDescription="SON, 0.50mm Pitch, 10-pin, 3.00mm W  X 3.00mm L X 0.80mm Height, (w/thermal tab 1.75 X 2.48 mm), IPC Medium Density"
  IC9 IC30: PackageDescription="SON, 0.50mm Pitch; 10 Pin, 3.00mm W X 3.00mm L X 0.80mm H body (w/Thermal Tab 1.75 X 2.48 mm), IPC Medium Density"
IC4 IC5 IC34: library part IFC_FIN1028, "3.3V LVDS 2-Bit High-Speed Differential Reciever", Case=SOIC8, Manufacturer="ON Semiconductor", Author=GK, Bonding=No, ComponentHeight=0.8mm, Component Type=Standard, CreateDate=08/11/2016, Device=FIN1028MX, HelpURL=\\cern.ch\dfs\Applications\Altium\Datasheets\FIN1101K8X.pdf, LatestRevisionDate=08/11/2016, Manufacturer Part Number=FIN1028MX, Mounted=Yes, PackageDescription="SOIC 8, Pitch 1.27mm - Body 4x5mm, IPC Medium Density", Part Description="3.3V LVDS 2-Bit High-Speed Differential Reciever", Part Number=FIN1028MX, Pin Count=8, PressFit=No, Sense=No, SMD=Yes, Socket=No
IC6: "1.7V-5.5V, 2K I2C Serial EEPROM With EUI-48 Node Identity", Case=SOT23-5, Manufacturer="MICROCHIP TECHNOLOGY", Author="CERN DEM MR", Bonding=No, Component Type=Standard, ComponentHeight=1.45mm, CreateDate=31.03.2016, Device=24AA02E48T-I/OT, HelpURL=\\cern.ch\dfs\Applications\Altium\Datasheets\24AA02E48T-I-OT.pdf, LatestRevisionDate=31.03.2016, Manufacturer Part Number=24AA02E48T-I/OT, Mounted=Yes, PackageDescription="SOT, 0.95mm pitch; 5 pin, 1.60mm W X 2.90mm L X 1.45mm H body, IPC Medium Density", Part Description="1.7V-5.5V, 2K I2C Serial EEPROM With EUI-48 Node Identity", Part Number=24AA02E48T-I/OT, Pin Count=5, PressFit=No, Sense=No, SMD=Yes, Socket=No
IC7: library part IFC_FIN1027A, "3.3V LVDS, 2-Bit, High-Speed, Differential Driver", Case=SOIC8, Manufacturer="ON Semiconductor", Author=GK, Bonding=No, ComponentHeight=0.8mm, Component Type=Standard, CreateDate=08/11/2016, Device=FIN1027AMX, HelpURL=\\cern.ch\dfs\Applications\Altium\Datasheets\FIN1101K8X.pdf, LatestRevisionDate=08/11/2016, Manufacturer Part Number=FIN1027AMX, Mounted=Yes, PackageDescription="SOIC 8, Pitch 1.27mm - Body 4x5mm, IPC Medium Density", Part Description="3.3V LVDS, 2-Bit, High-Speed, Differential Driver", Part Number=FIN1027AMX, Pin Count=8, PressFit=No, Sense=No, SMD=Yes, Socket=No
IC8 IC21: "20V, 200mA, Ultralow Noise, Ultrahigh PSRR RF Linear Regulator", Case=MSOP10, Manufacturer="LINEAR TECHNOLOGY", Author="CERN DEM MR", Bonding=No, Component Type=Standard, ComponentHeight=1.1mm, CreateDate=09.06.2016, Device=LT3042EMSE#PBF, HelpURL=\\cern.ch\dfs\Applications\Altium\Datasheets\LT3042EMSE#PBF.pdf, LatestRevisionDate=09.06.2016, Manufacturer Part Number=LT3042EMSE#PBF, Mounted=Yes, PackageDescription="SOP, 0.50mm, Pitch; 10 pin, 3.00mm W X 3.00mm L X 1.10mm H body (w/thermal tab  1.68 X 1.98 mm), IPC Medium Density", Part Description="20V, 200mA, Ultralow Noise, Ultrahigh PSRR RF Linear Regulator", Part Number=LT3042EMSE#PBF, Pin Count=11, PressFit=No, Sense=No, SMD=Yes, Socket=No
IC10: library part 24AA025E48-I/SN, "1.7V-5.5V, 2K I2C™ Serial EEPROMs with EUI-48™ Node Identity", Case=SOIC8, Manufacturer="MICROCHIP TECHNOLOGY", Author="CERN DEM MR", Bonding=No, Component Type=Standard, ComponentHeight=1.75mm, CreateDate=19.07.2016, Device=24AA02E48T-I/SN, HelpURL=\\cern.ch\dfs\Applications\Altium\Datasheets\24AA025E48-I-SN.pdf, LatestRevisionDate=19.07.2016, Manufacturer Part Number=24AA02E48T-I/SN, Mounted=Yes, PackageDescription="SOIC 8, Pitch 1.27mm - Body 4x5mm, IPC Medium Density", Part Description="1.7V-5.5V, 2K I2C™ Serial EEPROMs with EUI-48™ Node Identity", Part Number=24AA02E48T-I/SN, Pin Count=8, PressFit=No, Sense=No, SMD=Yes, Socket=No
IC11: "0.25ppm Noise, Low Drift Precision Buffered Voltage Reference", Case=SSOP8, Manufacturer="LINEAR TECHNOLOGY", Author="CERN DEM JLC", Bonding=No, Component Type=Standard, ComponentHeight=1.1mm, CreateDate=07.06.2012, Device=LTC6655BHMS8-5#PBF, HelpURL=\\cern.ch\dfs\Applications\Altium\Datasheets\LTC6655BHMS8-5#PBF.pdf, LatestRevisionDate=07.06.2012, Manufacturer Part Number=LTC6655BHMS8-5#PBF, Mounted=Yes, PackageDescription="SOP, 8-Leads, Body 3.1x3.1mm (max), Pitch 0.65mm, IPC Medium Density", Part Description="5V, 0.25ppm Noise, Low Drift Precision Buffered Voltage Reference", Part Number=LTC6655BHMS8-5#PBF, Pin Count=8, PressFit=No, Sense=No, SMD=Yes, Socket=No
IC12 IC32: Case=TSSOP14, Manufacturer="NXP SEMICONDUCTORS", Author="CERN DEM JLC", Bonding=No, Component Type=Standard, ComponentHeight=1.1mm, Device=74HC4066PW, HelpURL=\\cern.ch\dfs\Applications\Altium\Datasheets\74HC4066PW.pdf, Manufacturer Part Number=74HC4066PW, Mounted=Yes, PackageDescription="SOP, 14-Leads, Body 4.4x5mm (max), Pitch 0.65mm, IPC Medium Density", Part Description="Quad Single-Pole Single-Throw Analog Switch", Part Number=74HC4066PW, Pin Count=14, PressFit=No, SMD=Yes, Socket=No
  IC12: CreateDate=19.11.2014, LatestRevisionDate=19.11.2014, Sense=No
  IC32: CreateDate=2014-11-19, LatestRevisionDate=2014-11-19, Table="Standard Logic"
IC13: "Digital Temperature Sensor and Thermal Watchdog with Two-Wire Interface", Case=SSOP8, Manufacturer="TEXAS INSTRUMENTS", Author="CERN DEM JLC", Bonding=No, Component Type=Standard, ComponentHeight=1.09mm, CreateDate=15.10.2012, Device=LM75AIMM/NOPB, HelpURL=\\cern.ch\dfs\Applications\Altium\Datasheets\LM75AIMM-NOPB.pdf, LatestRevisionDate=15.10.2012, Manufacturer Part Number=LM75AIMM/NOPB, Mounted=Yes, PackageDescription="SOP, 0.65mm pitch; 8 pin,3.00mm W X 3.00mm L X 1.09mm H bodyI, PC Medium Density", Part Description="-25° to +100°C ±2°C Digital Temperature Sensor and Thermal Watchdog with Two-Wire Interface", Part Number=LM75AIMM/NOPB, Pin Count=8, PressFit=No, Sense=No, SMD=Yes, Socket=No
IC14: "2.5V/3.3V, Four LVPECL Outputs, SiGe Clock Fanout Buffer", Case=QFN16, Manufacturer="ANALOG DEVICES", Manufacturer Part Number=ADCLK944BCP, Author="CERN DEM JLC", Bonding=No, Component Type=Standard, ComponentHeight=0.8mm, CreateDate=17.07.2014, Device=ADCLK944BCPZ, HelpURL=\\cern.ch\dfs\Applications\Altium\Datasheets\ADCLK944BCPZ.pdf, LatestRevisionDate=25.03.2022, Mounted=Yes, PackageDescription="QFN, 0.50mm Pitch, Square; 16 Pin, 3.00mm L X 3.00mm W X 0.80mm H body (w/Thermal Tab 1.60 X 1.60mm), IPC Medium Density", Part Description="2.5V/3.3V, Four LVPECL Outputs, SiGe Clock Fanout Buffer", Part Number=ADCLK944BCPZ, Pin Count=17, PressFit=No, Sense=No, SMD=Yes, Socket=No
IC16: "4 Way-0°, 50 Ohms, 5 to 1000MHz, Power Splitter/Combiner", Manufacturer=MINI-CIRCUITS, Manufacturer Part Number=SCA-4-10, Author="CERN DEM JLC", Bonding=No, Component Type=Standard, ComponentHeight=5.84mm, CreateDate=03.11.2009, Device=SCA-4-10+, HelpURL=\\cern.ch\dfs\Applications\Altium\Datasheets\SCA-4-10+.pdf, LatestRevisionDate=09.06.2022, Mounted=Yes, PackageDescription="MINI-CIRCUITS TDZ943 Case, 10 Pin,  7.62mm W X 6.35mm L", Part Description="4 Way-0°, 50 Ohms, 5 to 1000MHz, Power Splitter/Combiner", Part Number=SCA-4-10+, Pin Count=10, PressFit=No, Sense=No, SMD=Yes, Socket=No
IC17: "1.600 MHz Clock distribution IC, dividers, Delay Adjust, Three Outputs", Case=QFN32, Manufacturer="ANALOG DEVICES", Author="CERN DEM HF", Bonding=No, Component Type=Standard, ComponentHeight=1mm, CreateDate=20.12.2023, Device=AD9514BCP, HelpURL=\\cern.ch\dfs\Applications\Altium\Datasheets\AD9514BCP.pdf, LatestRevisionDate=20.12.2023, Manufacturer Part Number=AD9514BCP, Mounted=Yes, PackageDescription="QFN, (MO-220-VHHD-2) 0.50mm Pitch, Square; 32 Pin, 5.00mm L X 5.00mm W X 1.00mm H body (w/Thermal Tab 3.25 X 3.25mm), IPC Medium Density", Part Description="1.6 GHz Clock Distribution IC, dividers, Delay Adjust, three Outputs", Part Number=AD9514BCP, Pin Count=33, PressFit=No, Sense=No, SMD=Yes, Socket=No
IC18: "Dual Operational Amplifier", Case=SOIC8, Manufacturer="TEXAS INSTRUMENTS", Manufacturer Part Number=LMV393M, Author="CERN DEM JLC", Bonding=No, Component Type=Standard, ComponentHeight=1.75mm, CreateDate=29.11.2012, Device=LMV393M/NOPB, HelpURL=\\cern.ch\dfs\Applications\Altium\Datasheets\LMV393M-NOPB.pdf, LatestRevisionDate=01.06.2022, Mounted=Yes, PackageDescription="SOIC 8, Pitch 1.27mm - Body 4x5mm, IPC Medium Density", Part Description="Dual General Purpose, Low Voltage, Tiny Pack Comparator", Part Number=LMV393M/NOPB, Pin Count=8, PressFit=No, Sense=No, SMD=Yes, Socket=No
IC19: library part OA_OPA2197IDGKR, "36-V, Precision, Rail-to-Rail Input Output, Low Offset Voltage Op Amp 8-VSSOP", Case=MSOP8, Manufacturer="TEXAS INSTRUMENTS", Author=GK, Bonding=No, Component Type=Standard, ComponentHeight=1.1mm, CreateDate=20.04.2017, Device=OPA2197IDGKR, HelpURL=\\cern.ch\dfs\Applications\Altium\Datasheets\OPA2140AIDGK.pdf, LatestRevisionDate=20.04.2017, Manufacturer Part Number=OPA2197IDGKR, Mounted=Yes, PackageDescription="SOP, 0.65mm pitch; 8 pin, 3.00mm W X 3.00mm L X 1.10mm H body, IPC Medium Density", Part Description="High-Precision, Low-Noise, Rail-to-Rail Output,10-MHz Op Amp", Part Number=OPA2197IDGKR, Pin Count=8, PressFit=No, Sense=No, SMD=Yes, Socket=No
IC20: library part REF_LTC6655CHLS8-4.096, "5.0V, 1uA Precision Voltage Reference", Case=8-CLCC, Manufacturer="LINEAR TECHNOLOGY", Author=GK, Bonding=No, Component Type=Standard, ComponentHeight=1mm, CreateDate=2011-10-10, Device=LTC6655BHLS8-5#PBF, HelpURL=\\cern.ch\dfs\Applications\Altium\Datasheets\LT6656ACS6-3.3#TRMPBF.pdf, LatestRevisionDate=2011-10-10, Manufacturer Part Number=LTC6655BHLS8-5#PBF, Mounted=Yes, PackageDescription="LCC, 8-Pins, Body 5,00x5,00mmx1,45mm, Pitch 1,27mm, IPC Medium Density", Part Description="5.0V, 0.05%, 10ppm/°C, 1uA Precision Voltage Reference", Part Number=LTC6655BHLS8-5#PBF, Pin Count=8, PressFit=No, Sense=No, SMD=Yes, Socket=No
IC33: "LinCMOS Timer", Case=SOIC8, Manufacturer="TEXAS INSTRUMENTS", Author="CERN DEM JMW", Bonding=No, Component Type=Standard, ComponentHeight=1.75mm, CreateDate=23.08.2016, Device=TLC555ID, HelpURL=\\cern.ch\dfs\Applications\Altium\Datasheets\TLC555ID.pdf, LatestRevisionDate=23.08.2016, Manufacturer Part Number=TLC555ID, Mounted=Yes, PackageDescription="SOIC 8, Pitch 1.27mm, Body 4x5mm, IPC Medium Density", Part Description="LinCMOS Timer", Part Number=TLC555ID, Pin Count=8, PressFit=No, Sense=No, SMD=Yes, Socket=No
IC36: "3.6V-20V To 1.5V-12V, Dual 2A or Single 4A  Ultrathin Step-Down DC/DC µModule Regulator", Case=BGA25, Manufacturer="LINEAR TECHNOLOGY", Author="CERN DEM MR", Bonding=No, Component Type=Standard, ComponentHeight=2.62mm, CreateDate=29.09.2017, Device=LTM4622AEY#PBF, HelpURL=\\cern.ch\dfs\Applications\Altium\Datasheets\LTM4622AEY#PBF.pdf, LatestRevisionDate=29.09.2017, Manufacturer Part Number=LTM4622AEY#PBF, Mounted=Yes, PackageDescription="BGA, 1.27mm Pitch, Square; 25 Pin, 5 Columns X 5 Rows, 6.25mm X 6.25mm X 2.62mm H", Part Description="3.6V-20V To 1.5V-12V, Dual 2A or Single 4A  Ultrathin Step-Down DC/DC uModule Regulator", Part Number=LTM4622AEY#PBF, Pin Count=25, PressFit=No, Sense=No, SMD=Yes, Socket=No
IC37: "2.7V to 5.5V, Serial-Input, Voltage-Output, 16-Bit DAC", Case=QFN16, Manufacturer="ANALOG DEVICES", Author="CERN DEM JLC", Bonding=No, Component Type=Standard, ComponentHeight=0.8mm, CreateDate=29.11.2018, Device=AD5542ABCPZ-REEL7, HelpURL=\\cern.ch\dfs\Applications\Altium\Datasheets\AD5542ABCPZ-REEL7.pdf, LatestRevisionDate=29.11.2018, Manufacturer Part Number=AD5542ABCPZ-REEL7, Mounted=Yes, PackageDescription="QFN, 0.50mm Pitch, Square; 16 Pin, 3.00mm L X 3.00mm W X 0.80mm H Body (w/Thermal Tab 1.75 X 1.75mm),  IPC Medium Density", Part Description="2.7V to 5.5V, Serial-Input, Voltage-Output, 16-Bit DAC", Part Number=AD5542ABCPZ-REEL7, Pin Count=17, PressFit=No, Sense=No, SMD=Yes, Socket=No
J1 J3 J4: library part DELOCK_65848, "50 Ohm Through Hole SMA Right Angle PCB Jack", Manufacturer=DELOCK, Manufacturer Part Number="5848 (4043619658480)", Author=GK, Component Type=Standard, ComponentHeight=12.5, CreateDate=13.05.2019, Family=SMA, HelpURL=\\cern.ch\dfs\Applications\Altium\Datasheets\AMPHENOL_132203-16.pdf, LatestRevisionDate=13.05.2019, Mounted=Yes, Part Description="50 Ohm Through Hole SMA Right Angle PCB Jack", Part Number=DELOCK_65848, Pin Count=5, PressFit=No, Sense=No, SMD=No, Socket=No, Status=None
J2: library part 3M_N2530-6002RB, "Connector 30 Male", Manufacturer=3M, Manufacturer Part Number=N2530-6002RB, Author="CERN DEM JLC", ComponentHeight=10.03mm, Component Type=Standard, CreateDate=11.02.2009, Family="Header 30", HelpURL=\\cern.ch\dfs\Applications\Altium\Datasheets\3M_N2530-6002RB.pdf, LatestRevisionDate=11.08.2009, Mounted=Yes, Part Description="30 Contacts - Straight .100'' x .100'' Low Profile Four-Wall Header, 2500 Series", Part Number=3M_N2530-6002RB, Pin Count=30, PressFit=No, Sense=No, SMD=No, Socket=No, Status=None
J5 J12: library part SAMTEC_MMCX-J-P-H-ST-TH1, Manufacturer=SAMTEC, Manufacturer Part Number=MMCX-J-P-H-ST-TH1, Author="CERN DEM JLC", Component Type=Standard, ComponentHeight=4.35mm, CreateDate=05.12.2012, HelpURL=\\cern.ch\dfs\Applications\Altium\Datasheets\SAMTEC_MMCX-J-P-H-ST-TH1.pdf, LatestRevisionDate=05.12.2012, Mounted=Yes, Part Description="Straight Through-hole 50 Ohms Micro Mini RF Jack, MMCX Series", Part Number=SAMTEC_MMCX-J-P-H-ST-TH1, Pin Count=2, PressFit=No, Sense=No, SMD=No, Socket=No, Status=None
J6: library part AMPHENOL_10052825-101LF, "72 Contacts Header, 6 Columns, 4 Pairs per Column", Manufacturer=AMPHENOL, Manufacturer Part Number=10052825-101LF, Author="CERN DEM MR", ClassName=Overlapping, ComponentHeight=15.35mm, ComponentLink1Description=Application, ComponentLink1URL=\\cern.ch\dfs\Applications\Altium\Datasheets\AMPHENOL_10052825-101LF_Application.pdf, Component Type=Standard, CreateDate=19/02/2018, Family="AirMax VS", HelpURL=\\cern.ch\dfs\Applications\Altium\Datasheets\AMPHENOL_10052825-101LF.pdf, LatestRevisionDate=19/02/2018, Mounted=Yes, Part Description="72 Contacts, 2mm Pitch, 6 Columns, 4 Pairs per Column, 4 Walls, Right Angle Header", Part Number=AMPHENOL_10052825-101LF, Pin Count=72, PressFit=Yes, Sense=No, SMD=No, Socket=No, Status=None
J7 J8 J9 J11: library part AMPHENOL_919-383J-51A, Manufacturer=AMPHENOL, Manufacturer Part Number=919-383J-51A, Author="CERN DEM BC", Component Type=Standard, ComponentHeight=6mm, CreateDate=31.01.2019, Family=MCX, HelpURL=\\cern.ch\dfs\Applications\Altium\Datasheets\AMPHENOL_919-383J-51A.pdf, LatestRevisionDate=31.01.2019, Mounted=Yes, Part Description="50 Ohm, RF Connector, MCX Right Angle PCB Receptacle Jack", Part Number=AMPHENOL_919-383J-51A, Pin Count=5, PressFit=No, Sense=No, SMD=No, Socket=No, Status=None
J10: library part CON_DC_5A_THT_RA, "24V /3. 5A, 2.1mm Diameter Pin, SMD DC Power Supply Connector With  Break Contact", Manufacturer=SWITCHCRAFT, Manufacturer Part Number=L712RA, Part Number=SWITCHCRAFT_L712RA, Author=GK, Component Type=Standard, ComponentHeight=11mm, CreateDate=15.02.2011, Family=Jack, HelpURL=\\cern.ch\dfs\Applications\Altium\Datasheets\LUMBERG_161314.pdf, LatestRevisionDate=20.07.2011, Mounted=Yes, Part Description="12V/5A, 2.5mm Diameter Pin, THT DC Power Supply Connector With  Break Contact", Pin Count=3, PressFit=No, Sense=No, SMD=No, Socket=No, Status=None
L1 L6 L8 L18: library part IND0603_MURATA_BLM18SG121TN1D, Case=0603, Manufacturer=MURATA, Manufacturer Part Number=BLM18SG121TN1D, Power=3A, Resistance=0.025R, Tolerance=±25%, Author="CERN DEM JLC", Component Type=Standard, ComponentHeight=0.65mm, CreateDate=23.07.2014, HelpURL=\\cern.ch\dfs\Applications\Altium\Datasheets\IND0603_MURATA_BLM18S.pdf, LatestRevisionDate=25.10.2018, Mounted=Yes, Part Description="SMD EMIFIL Suppression Chip Ferrite Bead", Part Number=IND0603_MURATA_BLM18SG121TN1D, Pin Count=2, Sense=No, SMD=Yes, Socket=No
L2 L3 L4 L10 L12 L17: library part IND_6.8UH_20%_COILCRAFT_XAL4030, "Inductor With Core", Manufacturer=COILCRAFT, Manufacturer Part Number=XAL4030-682MEB, Power=3A, Resistance=0.0741R, Tolerance=±20%, Author="CERN DEM MR", Component Type=Standard, ComponentHeight=2.1mm, CreateDate=14.03.2016, HelpURL=\\cern.ch\dfs\Applications\Altium\Datasheets\IND_COILCRAFT_XAL4030.pdf, LatestRevisionDate=14.03.2016, Mounted=Yes, Part Description="SMD Shielded Power Inductor", Part Number=IND_6.8UH_20%_COILCRAFT_XAL4030, Pin Count=2, Sense=No, SMD=Yes, Socket=No, Status=None
L9 L11 L13: library part IND0603_MURATA_BLM18PG471SN1D, Case=0603, Manufacturer=MURATA, Manufacturer Part Number=BLM18PG471SN1D, Power=1A, Resistance=0.2R, Tolerance=±25%, Author="CERN DEM BC", Component Type=Standard, ComponentHeight=0.95mm, CreateDate=17.02.2021, HelpURL=\\cern.ch\dfs\Applications\Altium\Datasheets\IND0603_MURATA_BLM18P.pdf, LatestRevisionDate=17.02.2021, Mounted=Yes, Part Description="SMD EMIFIL Chip Ferrite Bead", Part Number=IND0603_MURATA_BLM18PG471SN1D, Pin Count=2, Sense=No, SMD=Yes, Socket=No
L14 L16: library part IND0402_MURATA_BLM15HD601SN1, "Inductor", Case=0402, Manufacturer=MURATA, Manufacturer Part Number=BLM15HD601SN1D, Power=300mA, Resistance=0.85R, Tolerance=±25%, Author="CERN DEM JLC", Component Type=Standard, ComponentHeight=0.55mm, CreateDate=28/02/2012, HelpURL=\\cern.ch\dfs\Applications\Altium\Datasheets\IND0402_MURATA_BLM15H.pdf, LatestRevisionDate=28/02/2012, Mounted=Yes, Part Description="SMD EMIFIL Suppression Chip Ferrite Bead", Part Number=IND0402_MURATA_BLM15HD601SN1, Pin Count=2, Sense=No, SMD=Yes, Socket=No, Status=None
LD1 LD2 LD3 LD4 LD8 LD10 LD11: library part LED_KINGBRIGHT_KPH-1608CGCK, "LED Green 1C 2A", Manufacturer=KINGBRIGHT, Manufacturer Part Number=KPH-1608CGCK, Author="CERN DEM JLC", Bonding=No, Color=Green, Component Type=Standard, ComponentHeight=0.65mm, CreateDate=03/07/2017, HelpURL=\\cern.ch\dfs\Applications\Altium\Datasheets\LED_KINGBRIGHT_KPH-1608CGCK.pdf, LatestRevisionDate=03/07/2017, Mounted=Yes, PackageDescription="SMT Green LED, Case 0603, Body L 1.6 x W 0.8mm H 0.65mm", Part Description="SMD Green LED, Case 1.6mmX0.8mm(0603), 0.65mm Thickness", Part Number=LED_KINGBRIGHT_KPH-1608CGCK, Pin Count=2, PressFit=No, Sense=No, SMD=Yes, Socket=No
LD5 LD6 LD9: library part LED_DIALIGHT_555-2301F, "LED Green 1C 2A", Manufacturer=DIALIGHT, Manufacturer Part Number=555-2301F, Author="CERN DEM JMW", Bonding=No, Color=Green, Component Type=Standard, ComponentHeight=6.35mm, CreateDate=22.09.2008, HelpURL=\\cern.ch\dfs\Applications\Altium\Datasheets\LED_DIALIGHT_555-2301F.pdf, LatestRevisionDate=17.03.2010, Mounted=Yes, PackageDescription="Single 2mm Green LED, Body 5.08x2.54mm, Pin spacing 2.54mm", Part Description="Single 2mm Green LED CBI® Circuit Board Indicator", Part Number=LED_DIALIGHT_555-2301F, Pin Count=2, PressFit=No, Sense=No, SMD=No, Socket=No
LD7: library part LED_DIALIGHT_555-2001F, "LED Red 1C 2A", Manufacturer=DIALIGHT, Manufacturer Part Number=555-2001F, Author="CERN DEM JMW", Bonding=No, Color=Red, Component Type=Standard, ComponentHeight=6.35mm, CreateDate=22.09.2008, HelpURL=\\cern.ch\dfs\Applications\Altium\Datasheets\LED_DIALIGHT_555-2001F.pdf, LatestRevisionDate=17.03.2010, Mounted=Yes, PackageDescription="Single 2mm Red LED, Body 5.08x2.54mm, Pin spacing 2.54mm", Part Description="Single 2mm Red LED CBI® Circuit Board Indicator", Part Number=LED_DIALIGHT_555-2001F, Pin Count=2, PressFit=No, Sense=No, SMD=No, Socket=No
MSBOX1: library part MSBOX_LAIRD_BMI-S-207-F, Manufacturer=LAIRD, Manufacturer Part Number=BMI-S-207-F, Author="CERN DEM JLC", Component Type=Standard, ComponentHeight=9.75mm, CreateDate=04.07.2017, HelpURL=\\cern.ch\dfs\Applications\Altium\Datasheets\MSBOX_LAIRD_BMI-S-207-F.pdf, LatestRevisionDate=04.07.2017, Mounted=Yes, PackageDescription="Frame of Standard Surface Mount Shield (Two Piece), External Dimensions 44.37x 44.37mm", Part Description="Frame of Standard Surface Mount Shield (Two Piece), External Dimensions 44.37 x 44.37mm", Part Number=MSBOX_LAIRD_BMI-S-207-F, Pin Count=28, PressFit=No, Sense=No, SMD=Yes, Socket=No, Status=None